# Altium PCB egg.PcbDoc (part 2 of 3)
Units mil, origin at the board's own origin, x right, y up, seen from the top; angles counter-clockwise.
Board outline 3110.24 x 2637.8 mil, 4 copper layers (Top Layer, GND, PWR, Bottom Layer), stack 30.634 mil thick; 262 components, 132 nets, 710 pads, 642 vias.
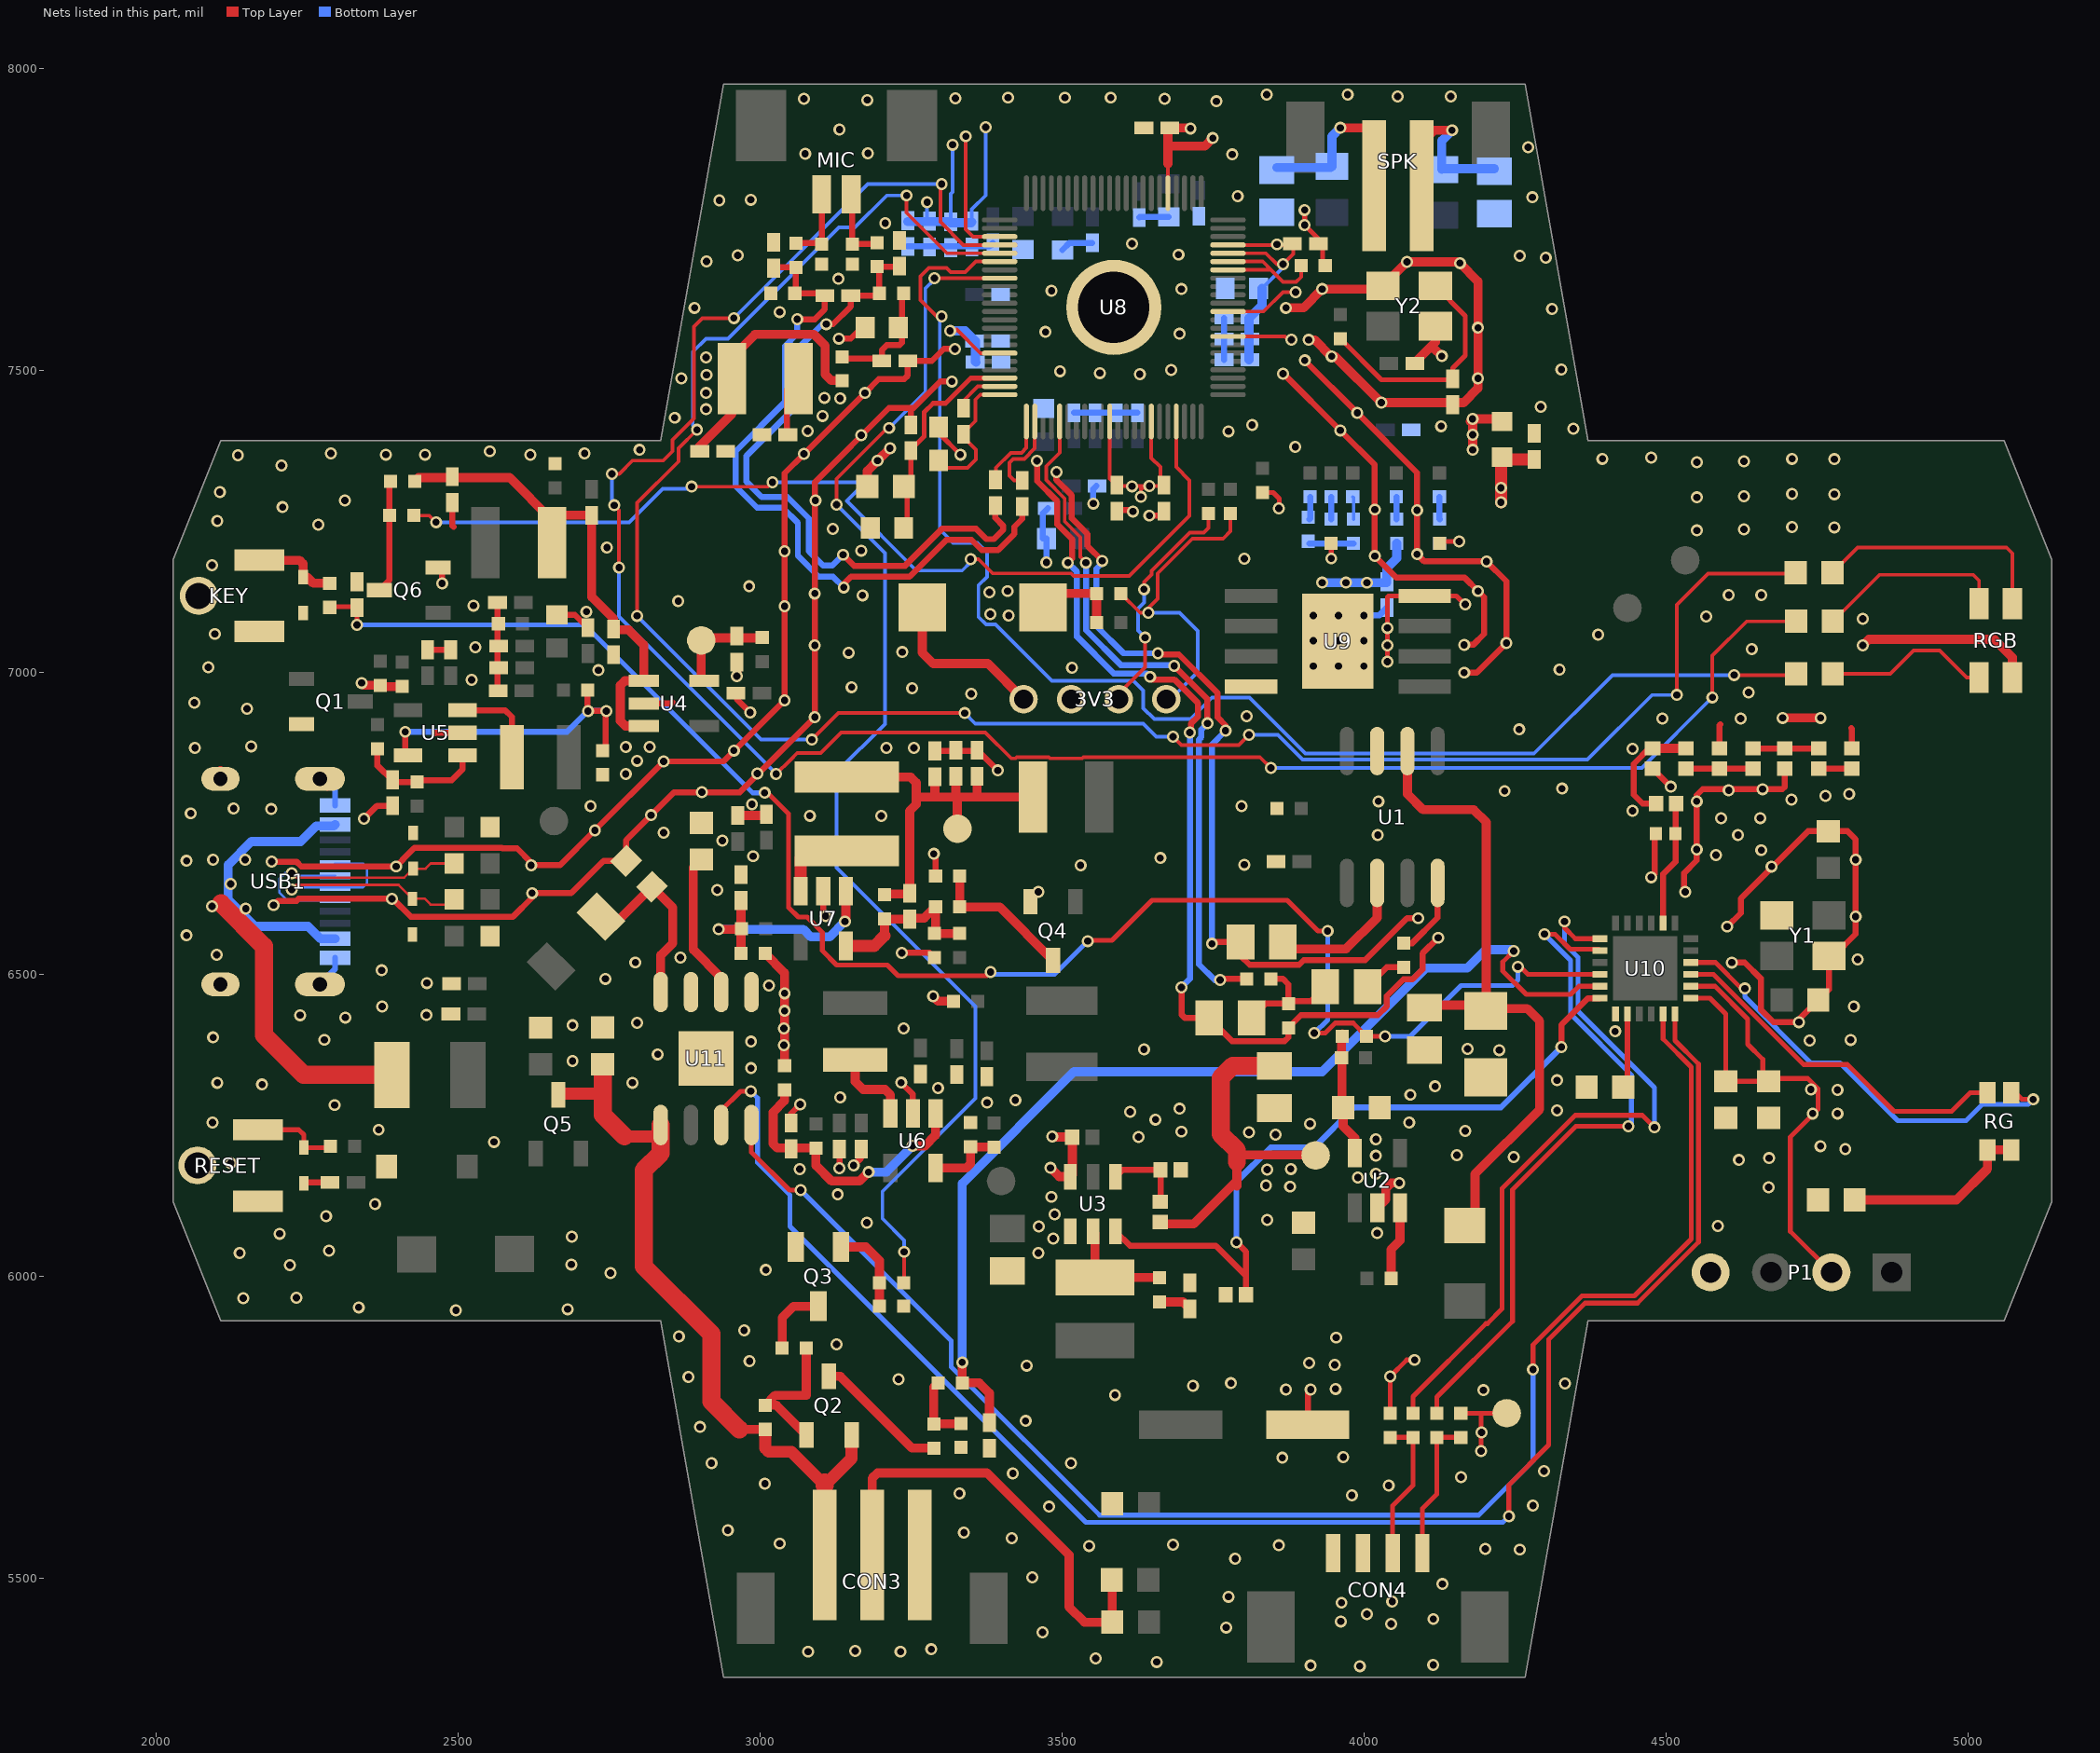
[diagram p4: the nets of this part, all layers, seen from the top]

## Via types
v1: diameter 20, hole 12, Top Layer to Bottom Layer, tented both sides, 642 vias

## Nets (pads, with @x,y where several pads share a name; then routed paths per layer and width w, separated by ;. In a path a pad name is that pad's centre, name@x,y a point inside that pad or via, vN(x,y) a via of type N, cw(c..) or ccw(c..) an arc to the next point about the centre after c; other vN are vias at no path point) (continued)
3V3_BLE: 3V3_BLE.1 C16.2 C24.1 C25.1 P1.2 R7.1 R8.1 R9.1 R24.2 U2.5 U10.13 U10.14 | length 1388.5
  Top Layer w8: R9.1@4043.7,5772.87 v1(4043.7,5833.7) 4071,5861 v1(4084,5861) ; R8.1@4160.51,5772.87 4194,5772.87 ; v1@4193,5709 v1(4194,5710) 4194,5772.87 ; 3V3_BLE.1@4237,5772.87 4194,5772.87 ; U10.13@4541.1,6460 4573,6460 4599,6434 C25.1@4599,6322.32 C24.1@4670,6322.32 ; U10.14@4541.1,6479.7 4581.3,6479.7 4635.5,6425.5 4635.5,6383.5 4660.5,6358.5 4660.5,6331.82 C24.1@4670,6322.32 ; P1.2@4774,6006 4706,6074 4706,6230 4752,6276 4752,6310 4735,6327 4674.68,6327 C24.1@4670,6322.32
  Top Layer w15: R24.2@3964.59,6401 3963,6399.41 R7.1@3963,6361.13 3963.63,6360.5 3963.63,6281.06 C16.2@3965.69,6279 3965.69,6247.86 3984.93,6228.61 U2.5@3984.93,6203.38
  other v1: 4195,5741 3990,6163 4020,6169 4020,6199 4020,6226.13 4743,6269 4784,6269 4784,6308 4740,6309
3V3_CPU: C61.1 C62.2 C63.1 C64.1 C65.1 C66.1 C67.1 C68.1 C69.1 C70.1 C71.1 C80.2 C87.2 C90.2 C91.2 FB3.1 FB4.2 R47.2 U8.11 U8.16 U8.30 U8.33 U8.40 U8.41 U8.49 U8.69 U8.83 | length 2334.3
  Top Layer w6: v1(3315,7565) 3324,7565 3326,7567 3365,7528 U8.83@3397.05,7528 ; v1(3341,7887) 3341,7733.13 3353.22,7720.91 U8.69@3397.05,7720.91 ; U8.11@3579.13,7414.81 3579.13,7319.87 3591,7308 v1(3645,7308) ; v1(3631,7289.87) 3631,7304.08 3631.66,7304.74 3641.74,7304.74 v1(3645,7308) ; U8.16@3648.03,7414.81 3648.03,7354.47 3663,7339.5 3663,7308 v1(3645,7308) ; U8.49@3675.59,7792.76 3675.59,7841.59 ; U8.30@3775,7555.56 3869.44,7555.56 3874.68,7550.31 v1(3880,7550.31) ; U8.33@3775,7596.9 3833.9,7596.9 3866,7629 v1(3887,7629) ; U8.40@3775,7693.35 3837.77,7693.35 3856.13,7675 v1(3866,7675) 3883.09,7692.09 3883.09,7709 3881.22,7707.13 U8.41@3775,7707.13
  Top Layer w10: C61.1@3045,7393 3045,7467 R47.2@3064,7486
  Top Layer w15: FB3.1@3178,7306.87 3178,7333 v1(3195,7350) v1(3215.5,7370.5) ; 3675.59,7841.59 3675.59,7871 ; v1(3713,7900) 3712,7901 3677.31,7901 3675.59,7899.28 3675.59,7871 ; v1(3750,7884) 3737,7871 3675.59,7871 ; v1(4180,7367.81) v1(4180,7393) 4180,7411 4176,7415 v1(4179.93,7418.93) FB4.2@4229,7418.93
  Bottom Layer w6: v1(3277,7778) 3277,7749 3280,7746 3281,7745 C70.1@3281,7746 ; C69.1@3316,7744 3316,7792 3319,7795 v1(3319,7873) ; C66.1@3351,7745 3351,7766 3374,7789 v1(3374,7902) ; C62.2@3831.46,7635 3866,7669.54 v1(3866,7675)
  Bottom Layer w15: C65.1@3245,7746 C70.1@3280,7746 ; C70.1@3281,7746 3314,7746 3316,7744 3350,7744 C66.1@3351,7745 ; v1(3315,7565) 3340,7565 3357,7548 3357,7514 C67.1@3358,7513 ; C68.1@3810,7517 3810,7586 3831.46,7607.46 C62.2@3831.46,7635
  other v1: 3616,7307.51 3079,7399 3104,7424 3133,7453 3107,7454.11 3856,7708
3V3_FLASH: C99.1 C100.1 FB4.1 R67.1 R68.1 R70.1 R86.2 U9.8 | length 654.9
  Top Layer w8: R70.1@3832,7297 3850,7297 3860,7287 3860,7271.82 v1(3859.18,7271) ; v1(3946,7188) R67.1@3945.97,7213 ; v1(4039,7017) v1(4039,7044) v1(4039,7073) 4039,7124 4041,7126 U9.8@4100.7,7126 4153,7126 4167,7112 v1(4168,7112) ; R68.1@4125.49,7213 4128.49,7216 v1(4158,7216)
  Top Layer w20: v1(4227,7281) v1(4227,7305) 4227,7350 4229,7352 4229.19,7352.19 C99.1@4282,7352.19
  Bottom Layer w15: v1@3930,7148.89 v1(3930.89,7148) 4038,7148 4038,7171.96 4054.35,7188.3 R86.2@4054.35,7213
  other v1: 3970.2,7148 4005,7147.89
3V3_NORMAL: C34.2 C42.1 C60.1 C86.1 D6.2 R1.1 R28.2 R37.2 R43.1 R47.1 R48.2 R54.1 R80.1 U4.1 U4.3 | length 1611.2
  Top Layer w15: R80.1@2429,7316 2435,7322 2586,7322 2656,7252 R28.2@2656,7245 ; R28.2@2656,7214 R28.2@2656,7245 ; U4.3@2808,6910.5 2777.5,6910.5 2769,6919 2769,6978 2776.5,6985.5 U4.1@2808,6985.5 2808,7045 2783.1,7069.9 2758,7069.9 C34.2@2758,7071.36 2758,7088 2721.63,7124.37 C86.1@2721.63,7259.54 2670.54,7259.54 R28.2@2656,7245 ; C60.1@2899,7372.21 2954,7427.21 R47.1@2954,7486 2954,7521 2992,7559 3089.76,7559 3108,7540.76 3108,7493.07 3118.44,7482.63 3136,7482.63 R1.1@3136,7482 ; R43.1@3009,6534 3041,6502 v1(3041,6468) v1(3041,6439) R37.2@3041,6348 ; D6.2@3469,7107 3492,7130 R54.1@3557.63,7130 R48.2@3557.63,7082
  other v1: 3040,6382 3040,6410 2778,6831 2797,6853 2778,6876 2817.7,6876 3412,7093.65 3381.5,7096 3380,7132 3410,7134 2911,7435 2911,7462 2911.66,7492 2911,7521
+5V_ULTRA: C31.2 CON4.1 R18.2 TP2.1 U3.4 | length 587.1
  Top Layer w15: R18.2@3663,6089.49 3666.4,6086.09 3717.95,6086.09 3789.73,6157.88 ; 3789.73,6149.19 3789.73,6157.88 ; 3789.73,6188.73 3789.73,6157.88 ; 3789.73,6208.25 3797.69,6200.28 TP2.1@3920,6200.28
  Top Layer w20: 3760,6293 3763,6290
  Top Layer w30: 3789.73,6188.73 3789.73,6208.25 3763,6234.98 3763,6290 3763,6328 3783.04,6348.04 C31.2@3852,6348.04 C31.2@3855,6351.04
  other v1: 4045,5424 3962,5428 4005,5440 3963,5459 4047,5461 3461,6038 3486,6062 3462,6082 3488,6102 3482.68,6131 3878,6148 3838,6150 3840,6176 3879,6177.14
AD_BAT: C27.2 R21.1 U10.5 | length 1729.3
  Top Layer w8: v1(4248,6538) 4230,6520 4230,6504.92 4268.92,6466 4342.3,6466 4356,6479.7 U10.5@4390.6,6479.7
  Top Layer w15: v1(3335,5857) R21.1@3335,5823 3363,5823 3380,5806 C27.2@3380,5757.46 C27.2@3380,5756
  Bottom Layer w15: v1(3335,5857) 3335,6153 3520,6338 3931,6338 4103,6510 4171.5,6510 4201.75,6540.25 4245.75,6540.25 v1(4248,6538)
AD_BAT_CON: R16.2 U8.74 | length 2086.1
  Top Layer w6: v1(3127,7277) 3127,7320 3211,7404 v1(3214,7404) ; R16.2@3238.13,5988.51 3239,5989.38 v1(3239,6040) ; v1@3288.98,7646.98 v1(3288.98,7652.02) 3311.8,7652.02 3334.18,7652 U8.74@3397.05,7652.02
  Bottom Layer w6: v1(3127,7277) 3207,7197 3207,6914 3127,6834 3127,6676 3357,6446 3357,6294 3203,6140 3203,6095 3239,6059 v1(3239,6040) ; v1(3214,7404) 3274,7464 3274,7635 3288.98,7649.98 v1(3288.98,7652.02)
AIN0: D1.2 FB1.1 MIC.1 | length 105.3
  Top Layer w10: MIC.1@3152.61,7771.91 3153,7771.52 D1.2@3153,7708.73 3191.73,7708.73 FB1.1@3194,7711
ALOUT: C11.1 C106.1 R89.2 R90.1 | length 208.4
  Top Layer w10: C106.1@3814,6427 3838,6451 R90.1@3875.08,6451 ; R89.2@3845.84,6492 3866,6492 3875.08,6482.92 R90.1@3875.08,6451 ; C11.1@3935.92,6479 3911.92,6455 3879.08,6455 R90.1@3875.08,6451
AUD_VRM: C97.2 L11.2 U8.88 | length 234.8
  Top Layer w6: L11.2@3296,7350.44 3308.44,7338 3344,7338 3358,7352 3358,7368.44 3334.01,7392.43 3357.1,7415.53 3357.1,7451.1 3365.1,7459.1 U8.88@3397.05,7459.1
AVDD_AUD: C88.2 C89.1 FB3.2 U8.86 | length 355.7
  Top Layer w8: C88.2@3244,7238.87 3244,7301.5 FB3.2@3238.63,7306.87 3250,7318.24 3250,7367.81 3272.25,7390.06 3272.25,7430.25 3287,7445 3307.46,7445 3349.12,7486.66 U8.86@3397.05,7486.66
BAT+: C103.1 CON3.1 Q2.2 Q5.3 R14.1 U11.5 | length 1171.7
  Top Layer w15: 2966,5746 R14.1@3009,5746
  Top Layer w20: Q5.3@2666.48,6299.94 2668.54,6302 2740,6302 ; 2776,6231 U11.5@2835,6231 ; R14.1@3009,5746 3009,5715 3015,5709 3052.1,5709 3103.03,5658.07 3107.26,5658.07 ; CON3.1@3107.26,5633 3107.26,5653.45 3151.88,5698.07 Q2.2@3151.88,5736.69
  Top Layer w30: C103.1@2740,6350.68 2740,6302 2740,6267 2776,6231 ; U11.5@2836,6250 2836,6203.29 2807.91,6175.2 2807.91,6016.09 2920,5904 2920,5792 2966,5746 ; 3107.26,5653.45 3107.26,5658.07
CHAR_G: RG.3 U10.15 | length 597.9
  Top Layer w8: U10.15@4541.1,6499.4 4578.57,6499.4 4727.97,6350 4800.31,6350 4877.83,6272.48 4972.94,6272.48 5003.69,6303.24 RG.3@5032.31,6303.24
CHARG_EN: U10.11 U11.8 | length 2569.2
  Top Layer w8: U11.8@2986,6250 2986,6205.09 3049.09,6142 v1(3067.6,6142) ; v1(4280,5845) 4280,5886 4361,5967 4447.97,5967 4542,6061.03 4542,6346 4495.4,6392.6 U10.11@4495.4,6434
  Bottom Layer w8: v1(3067.6,6142) 3317,5892.6 3317,5849.54 3562.54,5604 4190,5604 4280,5694 v1(4280,5845)
CHRG_R: RG.1 U10.16 | length 741.7
  Top Layer w8: U10.16@4541.1,6519.1 4581.9,6519.1 4625,6476 v1(4630.54,6476) ; RG.1@5071.69,6303.24 5075.14,6306.69 5089.41,6292.42 v1(5108,6292.42)
  Bottom Layer w8: v1(4630.54,6476) 4630.54,6462.46 4740,6353 4788,6353 4884,6257 4996.75,6257 5023.87,6284.13 5099.71,6284.13 v1(5108,6292.42)
CHRG_STATE: U10.12 U11.7 | length 2763.4
  Top Layer w8: U11.7@2936,6250 2936,6274 2968,6306 v1(2985,6306) ; v1(4240,5602) 4240,5654 4306,5720 4306,5895.03 4365.97,5955 4452.94,5955 4554,6056.06 4554,6350.97 4515.1,6389.87 U10.12@4515.1,6434
  Bottom Layer w8: v1(2985,6306) 2996.39,6294.61 2996.39,6187.76 3050,6134.14 3050,6082 3540,5592 4230,5592 v1(4240,5602)
DGND: 3V3.2 C1.2 C2.2 C3.1 C7.2 C8.2 C9.1 C10.1 C12.1 C13.1 C14.1 C15.1 C16.1 C18.1 C19.1 C20.1 C21.1 C22.1 C23.1 C24.2 C25.2 C26.1 C27.1 C28.2 C29.1 C30.1 C31.1 C32.1 C33.1 C34.1 C35.1 C36.1 C37.1 C38.1 C39.1 C40.1 C41.1 C42.2 C43.1 C44.1 C45.1 C46.2 C47.2 C48.1 C49.1 C50.2 C51.1 C52.1 C53.1 C54.1 C55.1 C56.1 C57.1 C59.1 C60.2 C61.2 C62.1 C63.2 C64.2 C65.2 C66.2 C67.2 C68.2 C69.2 C70.2 C71.2 C72.1 C73.1 C74.1 C75.1 C76.2 C77.2 C78.2 C79.2 C80.1 C81.1 C82.1 C83.2 C84.2 C85.2 C87.1 C88.1 C89.2 C90.1 C91.1 C92.1 C93.2 C94.2 C95.2 C96.2 C98.1 C99.2 C100.2 C101.2 C102.2 C103.2 C104.1 C105.1 C106.2 CNC1.1 CON3.3 CON4.2 D1.1 D2.1 D3.2 D4.1 D5.1 D7.2 D9.1 D10.1 KEY.2 KEY.3 L11.1 P1.4 Q1.2 Q3.2 Q4.2 Q6.2 R3.2 R4.2 R11.2 R13.1 R19.1 R20.2 R22.2 R23.1 R31.2 R33.2 R36.1 R39.1 R45.1 R49.1 R55.2 R59.2 R63.2 R69.1 R72.1 R75.1 R76.2 R77.2 R82.2 R87.2 R88.2 R90.2 RESET.2 RESET.3 RGB.1 U1.7 U2.2 U3.3 U4.2 U5.2 U6.2 U7.2 U8.89 U9.4 U9.9 U10.7 U11.1 U11.3 U11.9 USB1.1 USB1.2 USB1.3 USB1.4 USB1.A1B12 USB1.B1A12 Y1.2 Y1.4 Y2.2 Y2.4 | length 13216.6
  Top Layer w8: L11.1@3296,7405.56 3296,7396 v1(3332,7360) ; v1@3902,7765.6 v1(3902,7765) v1(3902,7740) 3923.09,7718.91 3923.09,7709 C80.1@3924.55,7709 3931.87,7709 3931.87,7677.13 R69.1@3936,7673
  Top Layer w10: v1(2192,6686) 2232.87,6686 2240.87,6678 v1(2398,6678) 2409.13,6689.13 2409.13,6690.01 2428.12,6709.01 2573.05,6709.01 2574.06,6708 2598,6708 2621.44,6684.56 v1(2621.44,6680) 2669,6680 v1(2727,6738) v1(2841,6852) 2940,6852 v1(3041,6953) v1(3041,7109) v1(3041,7200) 3041,7329 v1(3073,7361) v1(3174,7462) 3197,7485 3239,7485 3244.92,7490.92 C2.2@3244.92,7515 3284.75,7515 3304.75,7535 v1(3323,7535) ; v1(2195,6614) 2202,6621 2232.87,6621 2236.39,6624.52 v1(2391,6624.52) 2392.59,6624.52 2422.11,6595 2591.5,6595 2623,6626.5 v1(2623,6634) 2688,6634 2741.44,6687.44 C104.1@2778.56,6687.44 2778.56,6721.56 v1(2820,6763) 2858,6801 v1(2904,6801) 2966.8,6801 v1(3091,6925.2) v1(3091,7044) v1(3091,7130) 3091,7314 3214,7437 3249,7437 ; D4.1@2245,6153.57 2246.43,6155 C32.1@2288.54,6155 ; v1(2344.85,6757) 2366.39,6778.54 C52.1@2392,6778.54 ; C37.1@2450.08,7036.69 C38.1@2488.05,7036.69 ; 2462.32,6899 2462.65,6899.33 U5.2@2508.17,6899.33 ; Q6.2@2467.31,7172.88 2474,7166.19 v1(2474,7146.62) ; C42.2@2491,7280.54 2491,7242.36 2493,7240.36 ; C45.1@2565.86,7114.98 2565.86,6969.98 C40.1@2566.86,6968.98 ; C46.2@2664.32,7094.75 2694.01,7094.75 C47.2@2715.32,7073.44 ; U4.2@2808,6948 2854.35,6948 2855.78,6949.43 ; C36.1@2962,6965 2962,6955 v1(2984,6933) ; v1(2962,6993) 2965,6996 2965,7015 C35.1@2962,7018 ; C51.1@3051.83,6251.98 C51.1@3051.83,6253.44 3051.83,6269 v1(3066.83,6284) ; U7.2@3105,6637 3105,6600 v1(3109,6596) ; v1(3131,7552) 3150.54,7552 C1.2@3168.54,7570 ; v1(3131.83,6178.62) C43.1@3131.83,6210.14 C43.1@3131.83,6211.6 ; v1(3155.3,6182.98) 3167.83,6195.51 C44.1@3167.83,6211.82 ; v1(3234,6320.13) 3253.5,6300.63 U6.2@3253.5,6269.17 ; v1(3235,6535) 3281,6535 R45.1@3289,6527 ; C89.2@3250,7407.81 C89.2@3250,7409.27 3250,7436 3249,7437 ; v1(3288,6699) 3291,6696 R49.1@3291,6662 ; C57.1@3289.68,6868 3290.68,6869 3362,6869 v1(3394,6837) ; v1(3318,7481) 3298.84,7481 3254.84,7437 3249,7437 ; v1(3459,7349.76) 3459,7316.08 3492.63,7282.45 3492.63,7244.3 3517,7219.93 3517,7188 v1(3510,7181) ; v1(3491,7331) 3491,7318.02 3516.63,7292.39 3516.63,7254.24 3542.45,7228.42 3542.45,7208.55 v1(3567,7184) ; C91.1@3591,7268 3615.44,7268 v1(3617.65,7265.79) ; v1(3645,7259) 3660,7259 C90.1@3669,7268 ; v1(3646,6992) 3650.38,6987.62 3686.25,6987.62 3725.6,6948.28 3725.6,6926.47 3713.57,6914.44 3713.57,6901.56 v1(3712,6900) ; v1(3659,7031) 3661,7029 3693.87,7029 3758,6964.87 3758,6924.87 3771,6911.87 v1(3771,6903) ; v1(3698,6478) 3698,6433 3704,6427 C106.2@3743.92,6427 3781.86,6389.06 3869.06,6389.06 3875.08,6395.08 R90.2@3875.08,6411 3895.82,6431.74 4023.24,6431.74 4037.83,6446.34 4037.83,6463.34 4065.66,6491.17 4080.55,6491.17 4097,6507.62 4097,6534 v1(4123,6560) ; v1(3748.5,6550) 3751.5,6553 C9.1@3795.96,6553 3795.96,6530.04 3810.94,6515.06 3892.6,6515.06 3900.54,6523 4002,6523 4071.4,6592.4 v1(4090,6592.4) ; v1(3866,7494) 3866.87,7494 v1(3960.87,7400) 4018,7342.87 v1(4018,7269) v1(4018,7192) 4054,7156 4167,7156 v1(4189,7134) 4199,7124 4199,7063 4181,7045 v1(4166,7045) ; v1(3902.11,7516) v1(3989.11,7429) 4088,7330.11 v1(4088,7268) v1(4088,7195) 4100,7183 v1(4203,7183) 4236,7150 v1(4236,7048) 4186.99,6998.99 v1(4166,6998.99) ; C28.2@3907.14,5753.9 3907.14,5807.14 v1(3912,5812) ; v1(4475.7,6660.2) 4481.4,6665.9 4481.4,6730.3 D3.2@4483.25,6732.15 ; C18.1@4478,6840 4508,6810 v1(4508.13,6810) ; v1(4532,6636) 4532,6637.1 4530,6639.1 4530,6667 4551,6688 v1(4551,6706) v1(4551,6786) 4551,6796 4561,6806 v1(4660,6806) 4693,6806 4697,6810 C20.1@4697,6840 ; C19.1@4589,6873.46 4589,6912 4590,6913 ; v1(4601.5,6578.5) 4624,6601 4624,6625 4735.32,6736.32 4800.68,6736.32 4814,6723 v1(4814,6689) v1(4814,6595) 4814,6566 4778.07,6530.07 Y1.4@4770,6530.07 4770,6474.68 4720.22,6424.91 v1(4720.22,6420.17) 4678.19,6420.17 4657,6441.36 4657,6492.54 4630.54,6519 v1(4609,6519) ; 4806.75,6907 4808,6905.75 C21.1@4808,6873.46
  Top Layer w15: USB1.3@2107.12,6823.08 USB1.3@2107.12,6836.9 ; USB1.1@2271.7,6482.92 USB1.1@2284,6495.22 ; USB1.2@2271.7,6823.08 USB1.2@2284,6810.78 ; v1(2341,6981.85) 2344.85,6978 R11.2@2371.37,6978 2373.37,6976 R82.2@2408,6976 ; C54.1@2963.5,6762.46 3009,6762.46 C53.1@3011,6764.46 ; v1(3287,6463) 3295,6455 R33.2@3321,6455 ; v1(3481,6179) 3495.58,6164.42 U3.3@3514.2,6164.42 3517.27,6167.48 C30.1@3517.27,6230 v1@3485.26,6230 ; v1(3871,7603) 3900,7603 v1(3931,7634) 4026.22,7634 Y2.4@4031.69,7639.47 v1(4071.22,7679) 4157,7679 v1(4159,7677) 4189,7647 v1(4189,7570) v1(4189,7486.02) 4189,7469.81 4165.19,7446 v1(4028.93,7446) 3952.19,7522.74 v1(3946.73,7522.74) 3945.76,7522.74 3918.51,7550 v1(3908.51,7550) ; U2.2@4022.33,6112.83 4036.42,6126.92 4036.42,6145.54 4044.88,6154 v1(4058.64,6154) ; C72.1@4083,7511 4107.87,7535.87 ; Y2.2@4119.85,7571 Y2.2@4118.31,7572.53 4118.31,7546.31 4107.87,7535.87 ; v1(4129,7523) 4116.13,7535.87 4107.87,7535.87 ; v1(4693.42,6924) 4755.35,6924 v1@4756.1,6924.75 ; v1(4756.1,6924) v1@4756.1,6924.75 ; v1@4756.16,6924.81 v1@4756.1,6924.75 ; v1(4826,7044) 4836,7054 5043.69,7054 5073.56,7024.13 RGB.1@5073.56,6990.97
  Bottom Layer w10: USB1.1@2271.7,6482.92 2296.88,6508.1 USB1.A1B12@2296.88,6527.02 ; USB1.2@2271.7,6823.08 2290.92,6823.08 2296.88,6817.12 USB1.B1A12@2296.88,6778.98 ; C65.2@3245,7704.54 3380,7704.54 C83.2@3386,7710.54 ; C74.1@3468.54,7221 3468.54,7262.54 C78.2@3477,7271 ; v1(3474.44,7181.44) C74.1@3474.44,7221 ; C81.1@3501,7698.9 3512.64,7710.54 C84.2@3550.54,7710.54 ; v1(3510,7181) 3525,7166 3525,7058.69 3586.07,6997.62 3640.38,6997.62 v1(3646,6992) ; C93.2@3520,7429.27 C94.2@3555,7429.27 C95.2@3590,7429.27 C96.2@3625,7429.27 ; v1(3552,7279) 3552,7303 C85.2@3557,7308 ; v1(3567,7184) 3567,7181.13 3557,7171.13 3557,7076.13 3602.13,7031 v1(3659,7031) ; C79.2@3628,7752.54 3628.9,7753.44 C75.1@3677,7753.44 ; v1(3698,6478) 3712,6492 v1(3712,6900) ; v1(3748.5,6550) 3748.5,6879.02 3748,6879.52 3771,6902.52 v1(3771,6903) ; C68.2@3768.54,7517 C71.2@3768.54,7551.31 C63.2@3768.54,7586 ; R87.2@3910,7213 R59.2@3945.97,7213 R63.2@3983,7213 ; v1(4000,7093.65) 4025.11,7093.65 C100.2@4038,7106.54
  other v1: 3993.23,5354 3911.91,5355 4114.93,5356 3657,5361 3556,5367 3080,5378 3233,5378 3158,5379 3284,5382 3468,5410 3772,5418 4115,5432 3776,5469 4130,5490 3451,5501 3787,5532 4258,5547 4201,5548 3545,5553 3859.18,5554 3684,5555 3033,5557 3417,5566 3338,5575 2947,5579 3479,5618 4280,5620 3980,5637 3330.51,5640 4041,5653 3008.51,5656 4161,5667 3419,5673 4298,5677 2920,5690 3515,5690 3865,5699 3966,5700 2901,5750 3440,5760 3588,5803 4198,5811 3871,5812 3953,5813 3716.93,5818 4333,5822 3780,5822.51 3229.83,5829 2882,5833 3442,5851.56 3952,5853 3909.55,5856 2983,5859 3127,5887 3954,5898 2866,5900 2974,5910 2497,5943 2682,5945 2336,5948 2145,5963 2233,5964 2753,6005 3010,6010 2222,6018 2688,6019 2139,6038 2287,6042 2689,6065 2205,6070 4022,6071 4586,6083 3177,6088 3840,6093 2282,6099 2363,6119 3129,6135 4670,6147 3066,6176.86 2124,6187.04 4621,6192 4671,6195.18 4248,6197 4154,6200 4797,6210.13 4756,6215 2560,6222 3627,6230 3484,6230.73 3854,6234 3810,6238 3698,6239 4168,6239.98 2369,6242.1 3911,6252 2094,6254 4075,6254 3655,6259 3612.94,6272 4320,6274 3695,6277 2296,6283 3376.04,6287 3423,6291 3132.96,6295.74 4077,6300 3295,6311 4118,6314 2176,6317 2102,6320 2789,6320 4320,6324 2985.49,6344 2690,6356 2831,6367 4224,6374 3636,6375 4171.5,6376 2985.49,6388 4738,6390 2279,6391 4806,6390.89 2095,6395 4416,6405 3238,6410 2690,6415 2797,6419 2314,6428 2238.95,6431.74 2448,6432 2375,6446 4811,6446 3015,6481 2449,6485 2744.5,6492 2374,6506 2794,6519.1 4817.3,6524 2868.69,6527.16 2101,6532 2051,6564 3461,6636 2929.54,6639 4675,6677.91 3531,6680 3802,6681 2051,6687.44 3663,6692 2989,6695 4583,6697 4658,6705.05 2938,6721 4023,6730 4619.4,6730 2840.74,6734 4591.27,6758 4656,6758.21 3082.76,6762 3200.99,6761.61 2058,6766 4445,6770.41 2191,6773 2129,6773.88 2720,6778 3797.69,6778 2987,6781 4024,6786 4708,6788.83 4764,6795 4803.29,6798 4233,6803 4604,6804 4328,6807 2996,6832 2956.97,6870 4445,6873 2065,6874.5 3209.51,6874.5 3255,6874.5 2158,6877 4257,6905 4494,6923 4623.84,6923 3806,6927 2151,6939 2064,6949 3350,6964 4637,6966 3252.31,6973 3152,6975 2523,6987 2733,7002.87 4324,7004 3517,7007 2087,7008 3916.2,7009.85 3958,7009.85 4000,7009.85 3147,7032 3236,7033 4642,7038 2529,7041 3916.2,7051.85 3958,7051.85 4000,7051.85 4388,7061.8 2098,7063 4826,7087.95 4566.8,7092 3916.2,7093.65 3958,7093.65 2713,7100 2526,7110 2865,7117.32 3170,7127 4604,7127.26 4658,7127.26 2982.38,7141.81 2093,7177 3802,7187.57 3168,7201 2747,7206 4551.18,7234.42 4629.14,7236.24 3121,7237 4709,7240.24 4779,7239.64 2269,7244 2102,7250 2210,7273 2313,7284 3092,7284 4551.18,7289.18 4629.14,7291 4779,7294.41 4709,7295 2106,7298 2208,7342 4551.18,7347.18 4629.14,7349 4779,7352.41 4395,7353 4709,7353 4475.7,7355 2136,7359 2381,7360 2446,7360 2620,7359.69 2290,7362 2710,7362 2553,7365.46 2801,7367.81 3886.5,7372.89 3168,7392 3775.74,7398.46 4347,7403 4128,7407 3814.91,7409 2859,7421 4293,7439 2870,7486 3629,7493 3563,7495 3497,7498 3680.97,7500 4327,7501 3695,7560 3473,7563 3033,7596 4311.62,7601 2892,7603 3483,7631.14 3698,7634 3130,7651 2912,7680 4301,7686 4258,7689 2963.5,7690 3693,7691 3616,7709 3207.64,7743 2933,7781 2985,7782 4279,7786 3791,7788 3782,7857 3075,7858 3179,7859 4272,7869 3132,7898 3755.81,7945 3178,7947 3073,7949 3670,7949 3323.88,7950 3411,7951 3505,7951 3581,7951 4056,7953 4144,7953 3839,7956 3973.12,7956
EN_+5V_ULTRA: R23.2 U3.6 U10.6 | length 1189
  Top Layer w10: U3.6@3589,6073.94 3612.94,6050 3755,6050 3804.73,6000.27 ; v1(3789,6056) 3804.73,6040.27 3804.73,6000.27 ; R23.2@3804.73,5969 3804.73,6000.27 ; v1(4327,6379) 4327,6416 4371,6460 U10.6@4390.6,6460
  Bottom Layer w10: v1(3789,6056) 3789,6156 3846,6213 3918,6213 3984,6279 4227,6279 v1(4327,6379)
IRIN: R81.1 U8.19 | length 1667.7
  Top Layer w6: R81.1@2427,7259 2453,7259 v1(2464,7248) ; v1(2887,7306.87) 3013.81,7306.87 v1(3020.94,7314) ; v1(3349,7187) 3362,7187 3385.63,7163.37 3515.41,7163.37 3519.78,7159 3611.68,7159 3711.36,7258.67 3711.36,7317.33 3689.37,7339.31 U8.19@3689.37,7414.81
  Bottom Layer w6: v1(2464,7248) 2784,7248 2839.5,7303.5 2883.63,7303.5 v1(2887,7306.87) ; v1(3020.94,7314) 3175,7314 3144,7283 3259,7168 3335,7168 3349,7182 v1(3349,7187)
KEY: C33.2 R24.1 R26.2 U10.4 | length 2840
  Top Layer w8: R26.2@2288,7107 2289,7108 2333,7108 C33.2@2333,7106.54 v1(2333,7078) ; v1(3008,6800) 3012.96,6800 3047.79,6765.17 3047.79,6610.06 3063.75,6594.1 3078.3,6594.1 3099.01,6573.39 3103.52,6568.88 3103.52,6538.59 3127.28,6514.83 3211.14,6514.83 3228.91,6497.06 3375.97,6497.06 v1(3382,6503.09) ; v1(3542.8,6554.51) 3543.81,6555.52 3582.81,6555.52 3649.28,6622 3873,6622 3924,6571 v1(3940,6571) ; v1(3918,6402) 3936.03,6402 3952.77,6418.74 3982.26,6418.74 R24.1@4004,6397 v1(4035,6397) ; v1(4255,6512) 4259,6512 4271.6,6499.4 U10.4@4390.6,6499.4
  Bottom Layer w8: v1(2333,7078) 2710,7078 2988,6800 v1(3008,6800) ; v1(3382,6503.09) 3385.77,6499.32 3487.61,6499.32 v1(3542.8,6554.51) ; v1(3918,6402) 3940,6424 v1(3940,6571) ; v1(4035,6397) 4077,6397 4161,6481 4246,6481 4255,6490 v1(4255,6512)
LED_B: R50.2 U8.72 | length 2341.2
  Top Layer w6: v1(3301,7589) 3293,7589 3266,7616 3266,7655 3280.02,7669.02 3308.94,7669.02 3315.96,7662 3330.04,7662 3340.02,7662.02 3357.57,7679.57 U8.72@3397.05,7679.57 ; v1(4613,6995) 4713.68,6995 R50.2@4715.68,6997
  Bottom Layer w6: v1(3301,7589) 3298,7586 3298,7236 3320,7214 3360.18,7214 3376,7198.18 3376,7157.75 3362,7143.75 3362,7091.46 3374.46,7079 3390,7079 3483.38,6985.62 3618.38,6985.62 3635,6969 3635,6940 3653,6922 3713,6922 3748.5,6957.5 3810.5,6957.5 3903,6865 4281.54,6865 4411.54,6995 v1(4613,6995)
LED_G: R51.2 U8.71 | length 3435.1
  Top Layer w6: v1(2797,7093) 2797,7280 2865.46,7348.46 2865.46,7370.46 v1(2896,7401) ; v1(3086,6888) 3130,6932 v1(3339.02,6932) ; v1(3243,7789) 3243,7760.51 3310.15,7693.35 U8.71@3397.05,7693.35 ; v1(3684,6893) 3698,6879 3793,6879 v1(3810,6896) ; v1(4518,6962) 4518,7111 4570,7163 4713.67,7163 R51.2@4715,7164.33
  Bottom Layer w6: v1(2797,7093) 3002,6888 v1(3086,6888) ; v1(2896,7401) 2889,7408 2889,7530 2911,7552 2947.04,7552 2974,7578.96 ; 2974,7579 3130.97,7735.97 3157.34,7735.97 3210.37,7789 v1(3243,7789) ; v1(3339.02,6932) 3356.64,6914.38 3634.62,6914.38 3656,6893 v1(3684,6893) ; v1(3810,6896) 3857.86,6896 3898.86,6855 4370,6855 4477,6962 v1(4518,6962)
LED_R: R52.2 U8.70 | length 3518.4
  Top Layer w6: v1(2755,7327.81) 2766.81,7327.81 2768,7329 ; v1(2759,7276) 2767,7268 v1(2767,7173) ; 2768,7329.04 2788.96,7350 2840,7350 2855.46,7365.46 2855.46,7384.5 2891,7420.04 2891,7572 2905,7586 v1(2957,7586) ; v1(3027,6831) 3050.39,6854.39 3050.39,6854.51 3061.87,6866 3100.85,6866 3134.85,6900 3373.34,6900 3416.34,6857 3423.6,6857 3425.6,6859 3478.4,6859 3480.4,6857 3533.6,6857 3535.6,6859 3828,6859 v1(3846,6841) ; v1(3301,7808) 3298.84,7805.84 3298.84,7745.16 3336.87,7707.13 U8.70@3397.05,7707.13 ; v1(4577,6958) 4577,7027 4633.87,7083.87 R52.2@4715.68,7083.87
  Bottom Layer w6: v1(2755,7327.81) 2755,7280 v1(2759,7276) ; v1(2767,7173) 2767,7092 3027,6832 v1(3027,6831) ; v1(2957,7586) 3179,7808 v1(3301,7808) ; v1(3846,6841) 4460,6841 v1(4577,6958)
LINEOUT_L: R89.1 U8.5 | length 1165.8
  Top Layer w6: U8.5@3496.46,7414.81 3496.46,7363.18 3474,7340.72 3474,7318.05 3504.63,7287.42 3504.63,7249.27 3530.45,7223.45 3530.45,7190.55 v1(3540,7181)
  Top Layer w10: v1(3686,7010) 3741,6955 v1(3741,6915) ; v1(3762,6490) 3764,6492 R89.1@3805.84,6492
  Bottom Layer w10: v1(3540,7181) 3540,7069.16 3597.54,7011.62 3684.38,7011.62 v1(3686,7010) ; v1(3741,6915) 3731,6905 3731,6892.13 3727,6888.13 3727,6516 3753,6490 v1(3762,6490)
MIC_BIAS0: C1.1 C2.1 R1.2 R2.1 | length 206.5
  Top Layer w10: R1.2@3136,7522 3139.13,7518.87 C2.1@3202,7518.87 ; C2.1@3202,7515 C2.1@3202,7518.87 ; R2.1@3238,7627 3235.46,7624.46 3235.46,7570 3235.46,7545.46 3231.32,7541.31 3210.32,7541.31 3202,7533 C2.1@3202,7518.87
MICCM0: C6.2 U8.2 | length 142.6
  Top Layer w6: C6.2@3434.45,7317.05 3421.08,7317.05 3413,7325.13 3413,7346.26 3419.74,7353 3437.91,7353 3455.12,7370.2 U8.2@3455.12,7414.81
MICIN0: C4.2 U8.1 | length 128
  Top Layer w6: C4.2@3390,7318.46 3391,7319.46 3391,7338.41 3415.59,7363 3433.34,7363 3441.34,7371 U8.1@3441.34,7414.81
NetC3_2: C3.2 C4.1 C5.1 FB1.2 R2.2 | length 1136.3
  Top Layer w10: v1(3110,7576) 3121.31,7576 3150.46,7605.15 C5.1@3150.46,7623 3194,7623 R2.2@3198,7627 3198,7667 FB1.2@3194,7671 3228.65,7671 C3.2@3231,7673.35 ; v1(3138,7194.16) 3156.16,7176 3240.54,7176 3301.54,7237 3358,7237 3375,7220 3387.22,7220 3403.22,7236 3403.22,7241.76 3390,7254.99 C4.1@3390,7275.54
  Bottom Layer w10: v1(3110,7576) 3103.46,7576 3060,7532.54 3060,7440 2978,7358 2978,7315 3003,7290 3045.46,7290 3081,7254.46 3081,7200.08 3105,7176.08 3119.92,7176.08 v1(3138,7194.16)
NetC5_2: C5.2 C6.1 C7.1 FB2.2 R3.1 | length 1202.5
  Top Layer w10: C7.1@3023,7670 FB2.2@3059.6,7670 3059.6,7628.6 R3.1@3058,7627 3103.54,7627 C5.2@3107.54,7623 3107.54,7600.54 3091,7584 v1(3062,7584) ; v1(3139.02,7140) 3136,7143.02 3150.98,7158 3248,7158 3309,7219 3350.54,7219 3367.54,7202 3394.68,7202 3421.22,7228.54 3421.22,7240.36 3434.45,7253.58 C6.1@3434.45,7274.13
  Bottom Layer w10: v1(3062,7584) 3062,7560 3042,7540 3042,7447.46 2960,7365.46 2960,7307.54 2995.54,7272 3038,7272 3063,7247 3063,7192.62 3097.54,7158.08 3120.94,7158.08 v1(3139.02,7140) 3136,7143.05 v1@3137.98,7145.02
NetC9_2: C9.2 U1.2 | length 239.9
  Top Layer w15: C9.2@3866.04,6553 3877.54,6541.5 3970.5,6541.5 4022,6593 U1.2@4022,6650.85
NetC10_2: C10.2 L2.2 SPK.2 | length 209.5
  Top Layer w15: v1(3961,7901) SPK.2@4009,7901
  Bottom Layer w15: C10.2@3856,7835.37 3945.33,7835.37 L2.2@3947,7837.04 3947,7887 v1(3961,7901)
NetC11_2: C11.2 R5.1 | length 73.3
  Top Layer w10: C11.2@4006,6479 4038,6511 R5.1@4066,6511
NetC12_2: C12.2 C13.2 L1.2 U1.6 | length 1121.3
  Top Layer w15: U1.6@4072,6869.15 4072,6798 4098,6772 4182,6772 4202.5,6751.5 4202.5,6443.38 C13.2@4202,6442.88 ; C12.2@4100,6448.37 4196.51,6448.37 C13.2@4202,6442.88 ; L1.2@4167,6083.7 4184,6100.7 4184,6169 4291,6276 4291,6422 4270.12,6442.88 C13.2@4202,6442.88
NetC14_2: C14.2 L3.2 SPK.1 | length 289.8
  Top Layer w15: SPK.1@4096,7805 4096,7877 4116,7897 v1(4146,7897)
  Bottom Layer w15: v1(4146,7897) 4129,7880 L3.2@4129,7832.04 4130.33,7833.37 C14.2@4216,7833.37
NetC17_1: C17.1 D3.1 U10.20 | length 206.4
  Top Layer w10: U10.20@4495.4,6584.5 4495.4,6665.4 4516.05,6686.05 D3.1@4516.05,6732.15 4516.05,6781.05 C17.1@4517,6782
NetC17_2: C17.2 C18.2 L4.1 | length 191
  Top Layer w10: C18.2@4478,6873.46 4472.33,6873.46 4446.55,6847.68 4446.55,6796.95 4461.5,6782 C17.2@4483.54,6782
  Top Layer w15: C18.2@4478,6873.46 L4.1@4533,6873.46
NetC19_2: C19.2 L4.2 L5.1 | length 111
  Top Layer w10: L4.2@4533,6840 L5.1@4644,6840
NetC20_2: C20.2 L5.2 L6.1 | length 109
  Top Layer w10: L5.2@4644,6873.46 L6.1@4753,6873.46
NetC21_2: C21.2 L6.2 | length 55
  Top Layer w10: L6.2@4753,6840 C21.2@4808,6840
NetC26_2: C26.2 U10.8 | length 129
  Top Layer w10: C26.2@4419.31,6312 4436.3,6328.99 U10.8@4436.3,6434
NetC35_2: 1V8.1 C35.2 R27.1 U4.5 | length 174.1
  Top Layer w15: U4.5@2908,6985.5 2903.04,6990.46 2903.04,7053 2903.04,7056.37 3003.37,7056.37 R27.1@3004,7057
NetC51_2: C51.2 R32.1 R37.1 U6.1 | length 476
  Top Layer w15: R37.1@3041,6308 3041,6290 3022,6271 3022,6218.81 3028.83,6211.98 3051.83,6211.98 R32.1@3092.83,6211.98 3092.83,6183.23 3118.94,6157.12 3165.12,6157.12 v1(3180,6172) ; v1(3253,6215.49) 3273.49,6215.49 3290.9,6232.9 U6.1@3290.9,6269.17
  Bottom Layer w15: v1(3180,6172) 3209.51,6172 v1(3253,6215.49)
NetC52_2: C52.2 R30.1 R38.1 U5.1 | length 211.9
  Top Layer w10: R30.1@2367,6873 2367,6845 2392,6820 2394,6818 R38.1@2433,6818 2436,6821 2490,6821 2508.17,6839.17 U5.1@2508.17,6861.93
NetC55_2: C55.2 C56.2 C57.2 C58.1 L10.2 R40.1 R42.1 TP6.1 | length 705.6
  Top Layer w15: L10.2@3144,6826.02 3249.73,6826.02 3259,6816.76 3259,6795 ; R42.1@3206.6,6631 3208,6632.4 3248,6632.4 3248,6770 3259,6781 3259,6795 ; C57.2@3289.68,6828 3289.68,6793.68 3289,6793 ; C56.2@3324.68,6829 3324.68,6795.32 3327,6793 ; TP6.1@3327,6741 3327,6793 ; C55.2@3359.68,6829 3359.68,6797.25 3363.93,6793 ; R40.1@3452,6793 3363.93,6793 ; 3259,6795 3261,6793 3289,6793 ; 3289,6793 3327,6793 ; 3327,6793 3363.93,6793
NetC58_2: C58.2 R42.2 R44.2 R45.2 R46.2 U7.5 | length 274.2
  Top Layer w15: 3206.6,6563.6 R42.2@3206.6,6591 3246.6,6591 3248,6592.4 3272.4,6592.4 R44.2@3291,6611 3291,6569 3293,6567 R46.2@3331,6567
  Top Layer w20: U7.5@3142.4,6546.45 3189.45,6546.45 3206.6,6563.6
NetC59_2: C59.2 R41.1 R43.2 U7.1 | length 393
  Top Layer w15: v1(2932,6574) 2959,6574 R41.1@2960,6575 ; C59.2@2968.85,6623.16 2968.85,6534.15 R43.2@2969,6534 ; v1(3141,6587) 3142.4,6588.4 U7.1@3142.4,6637
  Bottom Layer w15: v1(2932,6574) 3072,6574 3084.5,6561.5 3115.5,6561.5 v1(3141,6587)
NetC73_2: C73.2 R53.1 Y2.3 | length 398.5
  Top Layer w8: R53.1@3961.31,7551.53 4029,7483.85 4146.82,7483.85 4147,7484.02 4147,7503 4168,7524 4168,7589.77 Y2.3@4118.31,7639.47
NetC97_1: C97.1 U8.87 | length 88.9
  Top Layer w6: C97.1@3336,7430.44 3336,7447.99 3360.89,7472.88 U8.87@3397.05,7472.88
NetC104_2: C104.2 R74.1 U11.4 | length 310.4
  Top Layer w15: R74.1@2737,6595 2747,6585 2761.87,6585 C104.2@2821.44,6644.56 2856,6610 2856,6551 2836,6531 U11.4@2836,6470
NetCNC1_2: CNC1.2 RNC1.1 | length 54.9
  Top Layer w15: RNC1.1@3661.81,5957 3700.54,5957 CNC1.2@3712,5945.54
NetCON1_2: D2.2 FB2.1 MIC.2 | length 106.9
  Top Layer w10: FB2.1@3059.6,7710 3101.13,7710 D2.2@3102.39,7708.73 3102.39,7770.91 MIC.2@3103.39,7771.91
NetCON3_2: CON3.2 R78.2 R79.1 | length 751.5
  Top Layer w15: CON3.2@3186,5538 3186,5665 3195,5674 3376,5674 3512,5538 3512,5452 3537.18,5426.82 R79.1@3583.56,5426.82 3583.56,5495.82 R78.2@3582.56,5496.82
NetCON4_3: CON4.3 R9.2 R10.2 | length 243.7
  Top Layer w8: R9.2@4043.7,5732.87 R10.2@4081.51,5732.87 4081.51,5653.51 4047.61,5619.61 CON4.3@4047.61,5541.02
NetCON4_4: CON4.4 R8.2 R12.2 | length 241.5
  Top Layer w8: CON4.4@4096.84,5541.02 4096.84,5614.84 4120.7,5638.7 R12.2@4120.7,5732.87 R8.2@4160.51,5732.87
NetD4_2: D4.2 R25.1 RESET.1 | length 145.1
  Top Layer w8: RESET.1@2169.5,6242.1 2236.75,6242.1 2245,6233.85 D4.2@2245,6212.62 2286.63,6212.62 R25.1@2289,6215
NetD5_2: D5.2 KEY.1 R26.1 | length 145.2
  Top Layer w15: KEY.1@2171.5,7185.1 2237.9,7185.1 2244,7179 D5.2@2244,7157 2251,7157 2261,7147 R26.1@2288,7147
NetD6_1: 3V3.1 D6.1 | length 274.4
  Top Layer w15: D6.1@3269,7107 3269,7031.98 3286.98,7014 3377.52,7014 3V3.1@3436.52,6955
NetD9_2: D9.2 R73.1 USB1.A6 USB1.B6 | length 496.3
  Top Layer w4: v1(2225,6640) 2232.5,6647.5 2402.03,6647.5 D9.2@2425,6624.52 2445.47,6624.52 2455,6615 2481.47,6615 R73.1@2490.33,6623.86
  Bottom Layer w4: v1(2225,6640) 2228.16,6643.16 USB1.A6@2296.88,6643.16 2342.78,6643.16 2350,6650.37 2350,6676 2343.47,6682.53 USB1.B6@2296.88,6682.53
NetD10_2: D10.2 R71.1 USB1.A7 USB1.B7 | length 496.6
  Top Layer w4: v1(2225,6667) 2232.5,6659.5 2411.03,6659.5 D10.2@2426,6674.48 2446.68,6674.48 2455.2,6683 R71.1@2490.33,6683
  Bottom Layer w4: USB1.B7@2296.88,6623.47 2295.42,6622 2217.54,6622 2205,6634.54 2205,6658 2214,6667 v1(2225,6667) 2229.16,6662.84 USB1.A7@2296.88,6662.84
NetF1_1: F1.1 USB1.A4B9 USB1.B4A9 | length 952.8
  Top Layer w30: 2108,6617 2179,6546 2179,6399 2245,6333 F1.1@2391,6333
  Bottom Layer w15: USB1.A4B9@2296.88,6558.51 2272.49,6558.51 2252,6579 2164,6579 2120,6623 2120,6681 2158.3,6719.3 2239.7,6719.3 2265.47,6745.07 2294.47,6745.07 USB1.B4A9@2296.88,6747.49
  other v1: 2149,6608 2093,6612 2124,6649 2095,6689 2148,6689
NetL7_1: L7.1 RNC1.2 U3.5 | length 184.7
  Top Layer w15: U3.5@3551.6,6073.94 3555,6070.54 L7.1@3555,5997.72 3661.09,5997.72 RNC1.2@3661.81,5997
NetL8_1: L8.1 U5.3 | length 152.5
  Top Layer w10: U5.3@2508.17,6936.73 2578.27,6936.73 2589.51,6925.49 L8.1@2589.51,6859
NetL9_1: L9.1 U6.3 | length 133.8
  Top Layer w15: L9.1@3158,6357.76 3158,6322 3171,6309 3207.13,6309 3216.1,6300.03 U6.3@3216.1,6269.17
NetL10_1: L10.1 U7.3 | length 68.7
  Top Layer w6: L10.1@3135.02,6695 L10.1@3144,6703.98
  Top Layer w20: U7.3@3067.6,6637 L10.1@3067.6,6693
NetLED1_2: R13.2 RG.2 RG.4 | length 312.1
  Top Layer w15: R13.2@4812.32,6126 4981,6126 5032.31,6177.31 RG.4@5032.31,6208.76 RG.2@5071.69,6208.76
NetLED2_2: R50.1 RGB.2 | length 276.5
  Top Layer w6: R50.1@4776.31,6997 4871.59,6997 4910.11,7035.51 4953.43,7035.51 4997.97,6990.97 RGB.2@5018.44,6990.97
NetLED2_3: R51.1 RGB.3 | length 402.6
  Top Layer w6: R51.1@4775.63,7164.33 4817.3,7206 5064,7206 5073.56,7196.44 RGB.3@5073.56,7113.03
NetLED2_4: R52.1 RGB.4 | length 316.5
  Top Layer w6: R52.1@4776.31,7083.87 4853.44,7161 5009,7161 5018.44,7151.56 RGB.4@5018.44,7113.03
NetP2_3: 3V3.3 R56.1 | length 392.5
  Top Layer w6: 3V3.3@3594,6955 3594,6964.04 3638,7008.04 v1(3638,7057) ; v1(3636,7137) 3636,7149 3648.43,7161.43 3648.43,7167.46 3711.97,7231 3735,7231 3742.7,7238.7 R56.1@3742.7,7262.45
  Bottom Layer w6: v1(3636,7137) 3636,7115.04 3626,7105.04 3626,7069 v1(3638,7057)
NetP2_4: 3V3.4 R54.2 R57.1 | length 535.6
  Top Layer w6: R54.2@3597.63,7130 3629.63,7098 v1(3643,7098) ; v1@3643,7106 3658.43,7121.43 3658.43,7163.31 3716.11,7221 3767,7221 3779,7233 R57.1@3779,7262.45
  Bottom Layer w6: v1(3643,7098) 3695,7098 3725,7068 3725,7000 3680,6955 3V3.4@3672.74,6955 3V3.4@3672,6955.74
NetQ2_1: Q2.1 R14.2 R15.1 | length 241.7
  Top Layer w15: R15.1@3077,5881 3077,5802.66 3076.74,5802.4 3025.4,5802.4 R14.2@3009,5786 3027.77,5786 Q2.1@3077.08,5736.69
NetQ2_3: Q2.3 R17.1 | length 222.8
  Top Layer w15: Q2.3@3114.48,5833.94 3133.06,5833.94 3202,5765 3252,5715 R17.1@3288,5715
NetQ3_1: Q3.1 R16.1 R19.2 | length 148.4
  Top Layer w15: Q3.1@3134.4,6048.21 3175.69,6048.21 3198.13,6025.78 R16.1@3198.13,5988.51 R19.2@3198.13,5950.35
NetQ3_3: Q3.3 R15.2 | length 117.8
  Top Layer w15: R15.2@3037,5881 3037,5931 3055.79,5949.79 Q3.3@3097,5949.79
NetQ4_3: Q4.3 R44.1 R49.2 | length 241.9
  Top Layer w15: R49.2@3331,6662 R44.1@3331,6611 3396.92,6611 Q4.3@3485.26,6522.66
NetQ6_3: Q6.3 R80.2 R81.2 | length 207.4
  Top Layer w10: Q6.3@2370.06,7135.48 2387,7152.42 R81.2@2387,7259 ; 2387,7240 2387,7314 R80.2@2389,7316
NetR5_2: R5.2 U1.4 | length 131.2
  Top Layer w10: R5.2@4066,6551 4080,6551 4122,6593 U1.4@4122,6650.85
NetR6_2: R6.2 U2.3 | length 122.9
  Top Layer w15: R6.2@4045,5996 4045,6044 4059.73,6058.73 U2.3@4059.73,6112.83
NetR10_1: R10.1 U10.1 | length 1224.2
  Top Layer w8: R10.1@4081.51,5772.87 4081.51,5800.51 4202.07,5921.07 4204.33,5921.07 4229,5945.74 4229,6145 4350,6266 4461,6266 v1(4481,6246) ; v1(4332,6587) 4332,6576.66 4350.26,6558.4 U10.1@4390.6,6558.4
  Bottom Layer w8: v1(4332,6587) 4332,6549.97 4354.3,6527.67 4354.3,6438.64 4481,6311.94 v1(4481,6246)
NetR12_1: R12.1 U10.2 | length 1140.1
  Top Layer w8: R12.1@4120.7,5772.87 4120.7,5799.7 4246,5925 4246,6143 4351,6248 v1(4438,6248) ; v1(4299,6566) 4316.2,6566 4341.2,6541 4388.4,6541 U10.2@4390.6,6538.8
  Bottom Layer w8: v1(4299,6566) 4342.3,6522.7 4342.3,6433.67 4443,6332.97 4443,6253 v1(4438,6248)
NetR17_2: R17.2 R21.2 R22.1 | length 116.2
  Top Layer w15: R17.2@3288,5755 R17.2@3288,5755.37 ; R21.2@3295,5823 3288,5816 R17.2@3288,5755.37 ; R22.1@3333,5756 3332.37,5755.37 R17.2@3288,5755.37
NetR18_1: R18.1 R20.1 U3.1 | length 135.1
  Top Layer w10: U3.1@3589,6164.42 3600.58,6176 R20.1@3663.27,6176 3663.27,6122.41 R18.1@3661.56,6120.7
NetR34_2: R34.2 R36.2 U5.5 | length 519.4
  Top Layer w10: v1(2413,6901) 2413,6866.55 U5.5@2417.62,6861.93 ; R34.2@2715,6970 2715,6936 v1(2715.5,6935.5) 2744.5,6935.5 2744.5,6874.5 R36.2@2740,6870
  Bottom Layer w10: v1@2413,6900.87 2680.87,6900.87 v1(2715.5,6935.5) v1(2746,6935.5)
NetR35_2: R35.2 R39.2 U6.5 | length 128.5
  Top Layer w15: U6.5@3290.9,6178.62 3291.27,6179 3342,6179 3348.87,6185.87 R39.2@3348.87,6213.63 ; R39.2@3348.87,6214 R39.2@3348.87,6213.63 ; R35.2@3388,6213 3387.37,6213.63 R39.2@3348.87,6213.63
NetR59_1: R59.1 R61.1 | length 36.9
  Bottom Layer w10: R59.1@3945.97,7253 R61.1@3945.97,7289.87
NetR63_1: R63.1 R65.1 | length 37.5
  Bottom Layer w6: R65.1@3981.51,7289.87 3983,7288.38 R63.1@3983,7253
NetR69_2: R69.2 U8.38 U8.39 | length 228.5
  Top Layer w6: U8.38@3775,7665.8 3846.3,7665.8 ; U8.39@3775,7679.57 3832.52,7679.57 3846.3,7665.8 ; R69.2@3896,7673 3896,7654 3888,7646 3866.1,7646 3846.3,7665.8
NetR72_2: R72.2 U11.2 | length 244.1
  Top Layer w15: R72.2@2903.04,6689.68 2890,6676.64 2890,6540 2936,6494 U11.2@2936,6470
NetR83_1: R83.1 R86.1 | length 37.1
  Bottom Layer w10: R83.1@4053.85,7289.87 4054.35,7289.38 R86.1@4054.35,7253
NetR84_1: R84.1 R87.1 | length 37.3
  Bottom Layer w10: R87.1@3910,7253 3911.02,7254.02 R84.1@3911.02,7289.87
NetR85_1: R85.1 R88.1 | length 37.1
  Bottom Layer w10: R85.1@4125,7289.87 4125,7253.49 R88.1@4125.49,7253